# EAGLE board Water_Schematic2_1 (EAGLE 9.5.0)
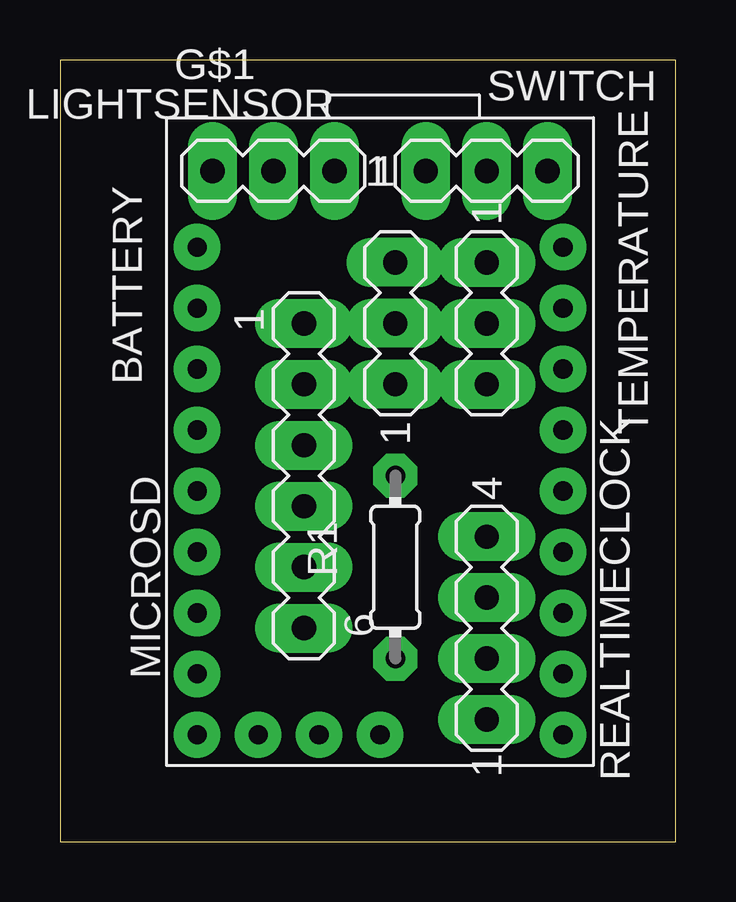
[diagram p0: board, top side]
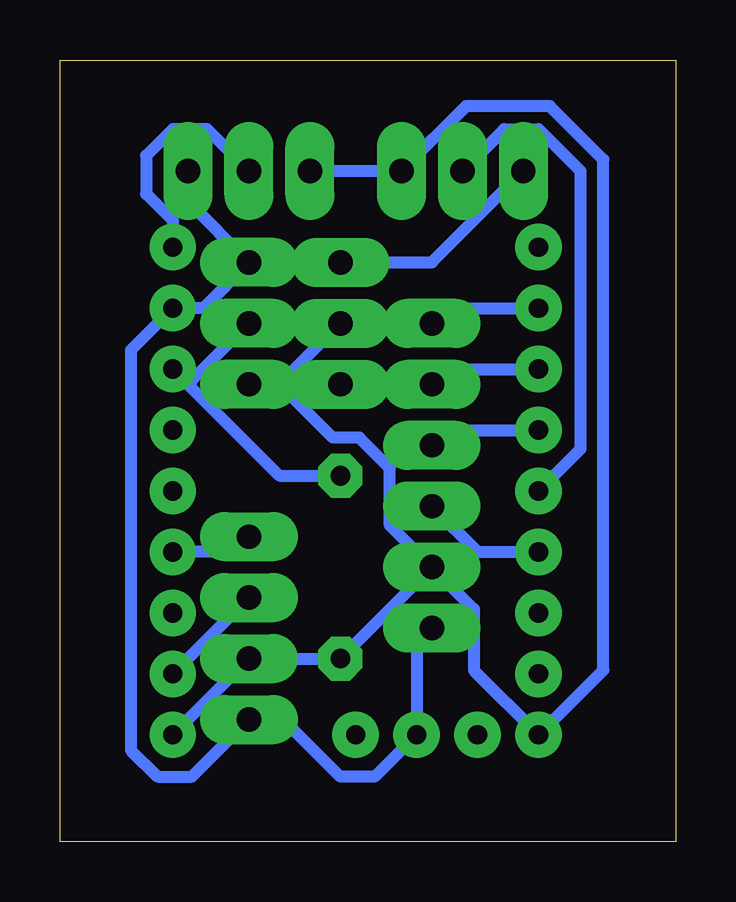
[diagram p1: board, bottom side, seen from below]

Size 25.65 x 32.56 mm. Coordinates in mm from the lower left corner, seen from the top.
Outline: 0,0 25.65,0 25.65,32.56 0,32.56 0,0
Copper layers (1*16): Top 0mil / dielectric 1.5mm / Bottom 0.035mm
Design rules "tad265_drc(1) *": minimum track width 20mil, minimum drill 0.35mm, track to track 16mil, track to pad 16mil, pad to pad 16mil, via to via 16mil, smd to smd 16mil, copper to edge 60mil, drill to drill 16mil, minimum pad ring 20mil, minimum via ring 15mil, stop-mask expansion 8mil, vias tented up to drill 0mil, thermal gap 20mil

## Footprints (pad centres in the part's own frame; a part is rotated, then mirrored left to right if it is on the bottom)
MA03-1 = drill 1.016 long: 1 -2.54,0; 2 0,0; 3 2.54,0
MA06-1 = drill 1.016 long: 1 -6.35,0; 2 -3.81,0; 3 -1.27,0; 4 1.27,0; 5 3.81,0; 6 6.35,0
0204/7 = drill 0.813 octagon: 1 -3.81,0; 2 3.81,0
MA04-1 = drill 1.016 long: 1 -3.81,0; 2 -1.27,0; 3 1.27,0; 4 3.81,0
DIGISPARK_PRO = drill 0.8 pad 1.93: GND1 15.875,6.985; GND2 5.715,-10.795; PA0 0.635,-8.255; PA1 0.635,-5.715; PA2 0.635,-3.175; PA3 0.635,-0.635; PA4 0.635,1.905; PA5 0.635,4.445; PA6 0.635,6.985; PA7 15.875,4.445; PB0 15.875,-8.255; PB1 15.875,-5.715; PB2 15.875,-3.175; PB3 15.875,1.905; PB6 15.875,-0.635; PB7 0.635,9.525; VCC1 15.875,-10.795; VCC2 3.175,-10.795; VCC3 0.635,-10.795; VIN1 15.875,9.525; VIN2 8.255,-10.795

## Placement (x,y rotation side)
BATTERY  [MA03-1]  13.97,21.59 90 top
LIGHTSENSOR  [MA03-1]  8.89,27.94 180 top
MICROSD  [MA06-1]  10.16,15.24 270 top
R1  4.7K  [0204/7]  13.97,11.43 270 top
REALTIMECLOCK  [MA04-1]  17.78,8.89 90 top
SWITCH  [MA03-1]  17.78,27.94 0 top
TEMPERATURE  [MA03-1]  17.78,21.59 270 top
U$1  DIGISPARK_PRO  [DIGISPARK_PRO]  5.08,15.24 0 top

## Library data of the parts
BATTERY LIGHTSENSOR MICROSD REALTIMECLOCK SWITCH TEMPERATURE = con-lstb; OC_FARNELL: unknown; OC_NEWARK: unknown
R1 = rcl; SPICEPREFIX: R
U$1 = digistump

## Nets
DATA: LIGHTSENSOR.2 U$1.PA3
GND: BATTERY.3 LIGHTSENSOR.3 MICROSD.6 REALTIMECLOCK.1 SWITCH.3 TEMPERATURE.1 U$1.GND1 U$1.GND2
MISO: MICROSD.4 U$1.PA2
MOSI: MICROSD.3 U$1.PA4
SC: MICROSD.1 U$1.PA6
SCK: MICROSD.2 U$1.PA5
SCL: REALTIMECLOCK.4 U$1.PB2
SDA: REALTIMECLOCK.3 U$1.PB0
TEMP: R1.1 TEMPERATURE.2 U$1.PA7
VCC: BATTERY.2 LIGHTSENSOR.1 MICROSD.5 R1.2 REALTIMECLOCK.2 SWITCH.1 TEMPERATURE.3 U$1.VCC1 U$1.VCC3
VIN: SWITCH.2 U$1.VIN1

## Tracks (layer width: path | path; a pad name or v marks a point on that pad's centre or on a via)
DATA
  Bottom 0.508: U$1.PA3 3.97,16.35 3.97,27.94 5.71,29.69 7.14,29.69 LIGHTSENSOR.2
GND
  Bottom 0.508: MICROSD.6 10.79,8.26 U$1.GND2 12.54,2.7 13.97,2.7 16.35,5.08 REALTIMECLOCK.1 20.16,2.7 21.59,2.7 22.7,3.81 22.7,20.48 U$1.GND1 19.68,22.23 TEMPERATURE.1 | SWITCH.3 20.32,26.67 TEMPERATURE.1 | LIGHTSENSOR.3 10.16,24.13 BATTERY.3 14.13,23.97 17.62,23.97 TEMPERATURE.1
MISO
  Bottom 0.508: U$1.PA2 8.26,12.06 MICROSD.4
MOSI
  Bottom 0.508: U$1.PA4 9.53,17.14 MICROSD.3
SC
  Bottom 0.508: U$1.PA6 9.53,22.23 MICROSD.1
SCK
  Bottom 0.508: U$1.PA5 9.53,19.68 MICROSD.2
SCL
  Bottom 0.508: U$1.PB2 18.41,12.06 REALTIMECLOCK.4
SDA
  Bottom 0.508: REALTIMECLOCK.3 U$1.PB0
TEMP
  Bottom 0.508: R1.1 16.51,15.24 U$1.PA7 20.16,19.21 TEMPERATURE.2
VCC
  Bottom 0.508: U$1.VCC1 REALTIMECLOCK.2 R1.2 MICROSD.5 | 16.51,19.05 TEMPERATURE.3 | BATTERY.2 16.51,19.05 | SWITCH.1 LIGHTSENSOR.1 8.73,30.64 5.24,30.64 3.02,28.42 3.02,7.14 U$1.VCC3 8.41,7.14 8.41,9.68 MICROSD.5 | 16.51,19.05 14.29,16.83 13.18,16.83 11.91,15.56 11.91,13.18 MICROSD.5
VIN
  Bottom 0.508: U$1.VIN1 20.95,25.88 22.07,26.99 22.07,28.57 20.95,29.69 19.53,29.69 SWITCH.2